# Altium PCB Radio_WMCU.pcbdoc
Units mm, origin at the board's own origin, x right, y up, seen from the top; angles counter-clockwise.
Board outline 76 x 43 mm, 2 copper layers (Top Layer, Bottom Layer), stack 0.325 mm thick; 62 components, 43 nets, 245 pads, 111 vias.
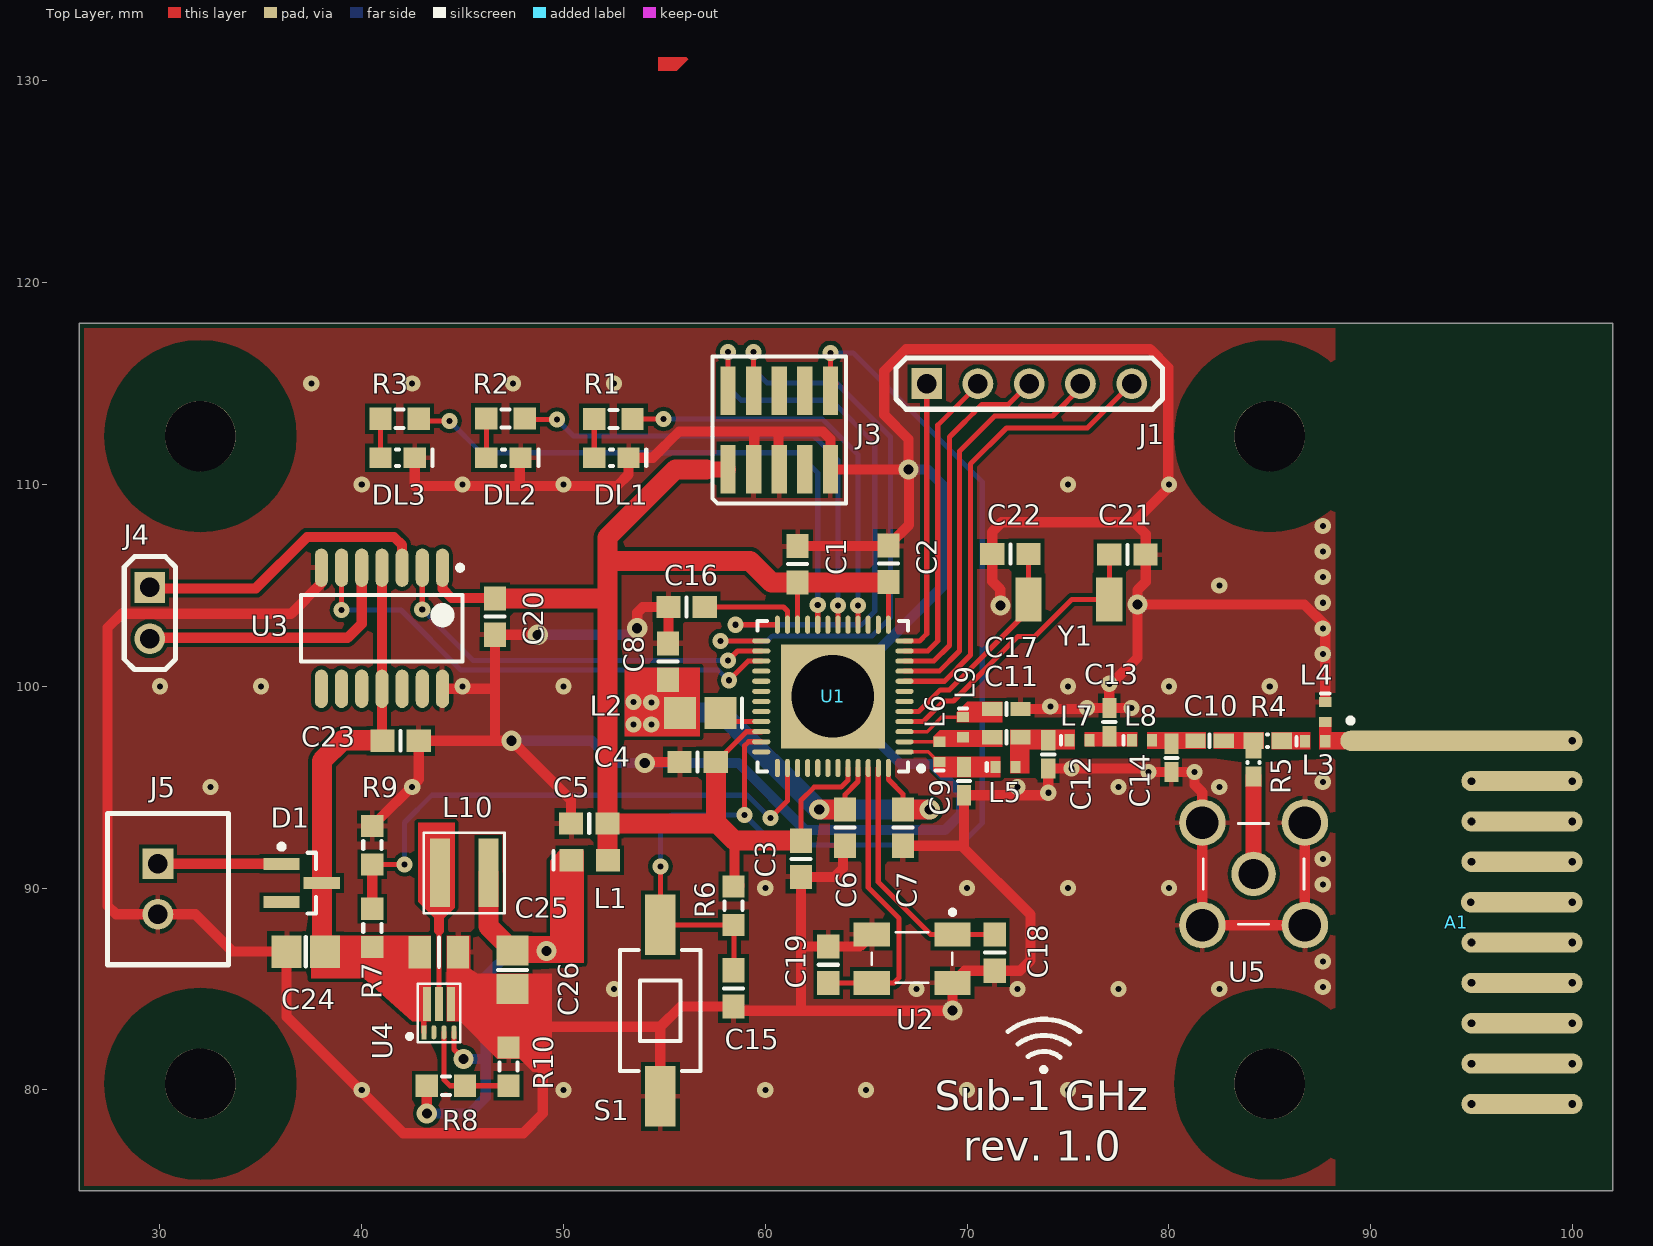
[diagram p0: Top Layer view]
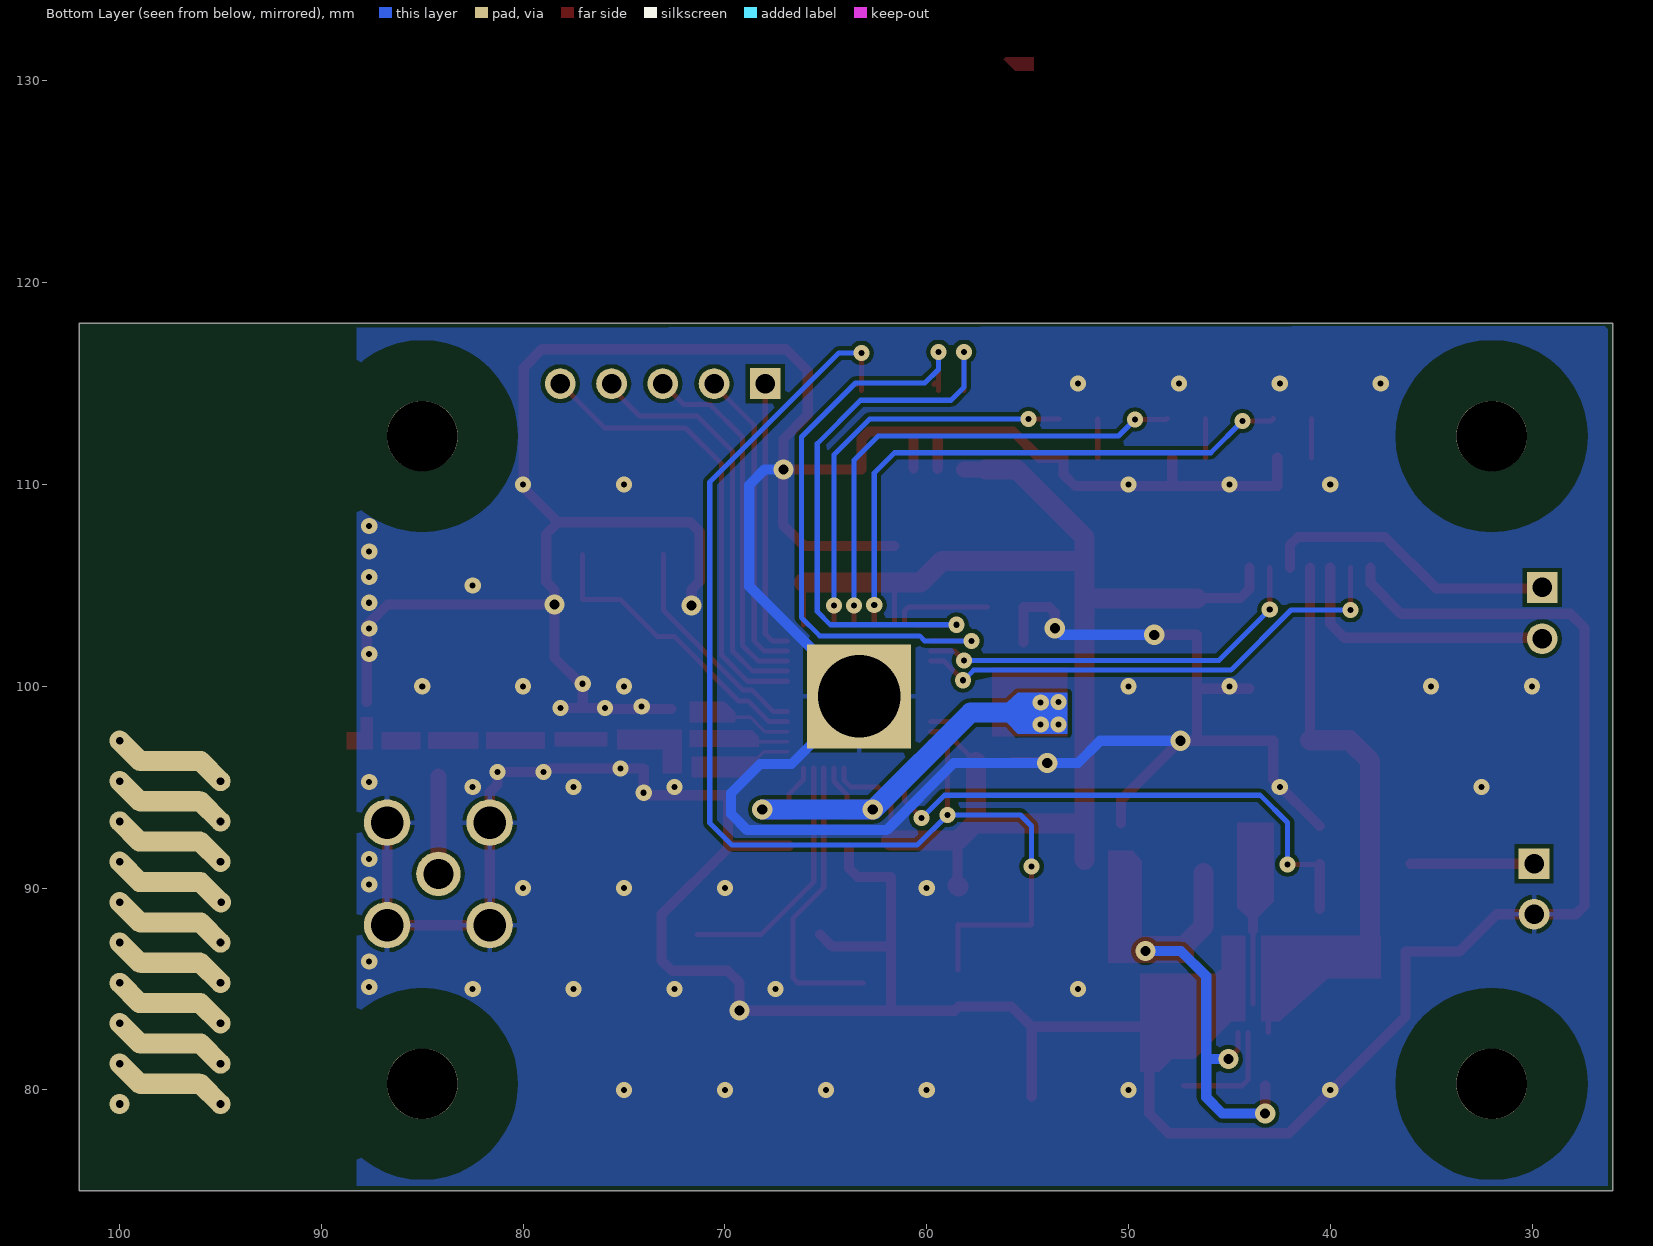
[diagram p1: Bottom Layer view, seen from below]
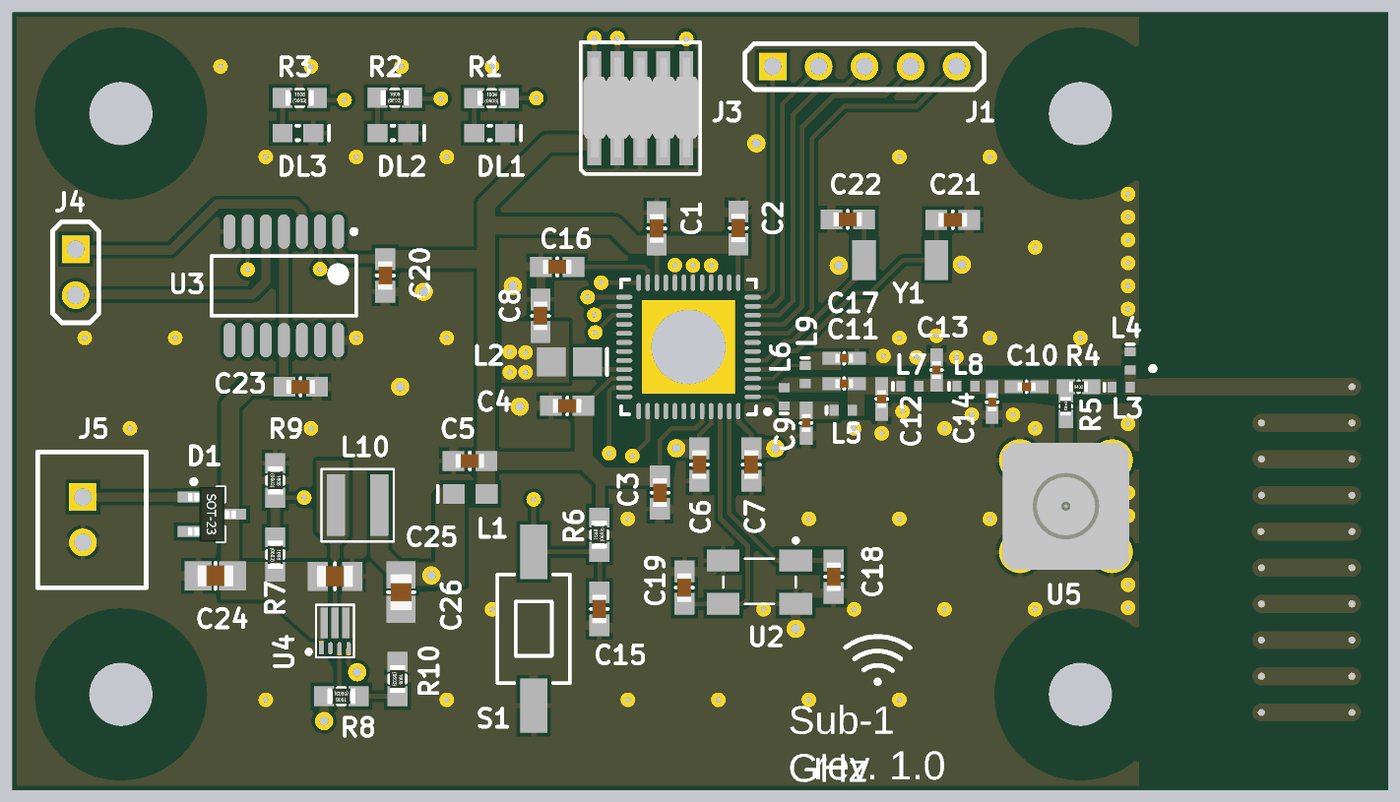
[diagram p2: 3D render of the assembled board from above, using the file's embedded part models]

## Layer stack, top to bottom
Top Solder: solder mask 0.0102, Solder Resist, Dk 3.5
Top Layer: signal copper 0.0356
Dielectric 1: core 0.254, FR-4, Dk 4.2
Bottom Layer: signal copper 0.0356
Bottom Solder: solder mask 0.0102, Solder Resist, Dk 3.5

## Board outline
26,75 26,118 102,118 102,75

## Design rules (kind name [scope] priority, off if disabled: settings)
AssemblyTestPointUsage [All] p1 off:
AssemblyTestpoint [All] p1 off: testpointundercomponent=TRUE minsize=1.016 maxsize=2.54 preferedsize=1.524 minholesize=0 maxholesize=1.016 preferedholesize=0.813 testpointgrid=0.025 usegrid=TRUE gridtolerance=0 allowsidetop=TRUE allowsidebottom=TRUE
Clearance UnplatedPads_Clearance [IsPad and OnLayer('Multi-Layer') and not PadIsPlated] p1: gap=3
Clearance Poly_Clearance [InPolygon] p2: gap=0.2
Clearance Class4_ExtLayers_Clearance [All] p3: gap=0.15
Clearance Class4_IntLayers_Clearance [OnCopper and not (OnLayer('Top Layer') or OnLayer('Bottom Layer'))] p4: gap=0.15
DiffPairsRouting [All] p1: maxlimit=0.15 minlimit=0.15 mostfreqgap=0.15 toplayer_minwidth=0.25 toplayer_maxwidth=0.25 toplayer_prefwidth=0.25 bottomlayer_minwidth=0.25 bottomlayer_maxwidth=0.25 bottomlayer_prefwidth=0.25 maxuncoupledlength=10
FabricationTestPointUsage [All] p1 off: valid=0 allowmultiple=FALSE
FabricationTestpoint [All] p1 off: side=3 testpointundercomponent=TRUE minsize=1.016 maxsize=2.54 preferedsize=1.524 minholesize=0 maxholesize=1.016 preferedholesize=0.813 testpointgrid=0.025 allowsidetop=TRUE allowsidebottom=TRUE usegrid=TRUE gridtolerance=0
HoleSize HoleSize_UnplatedPads [IsPad and not PadIsPlated] p1: absolutevalues=TRUE maxlimit=999 minlimit=0.5 maxpercent=80.000 minpercent=20.000
HoleSize HoleSize_PlatedPads [IsPad and PadIsPlated] p2: absolutevalues=TRUE maxlimit=999 minlimit=0.3 maxpercent=80.000 minpercent=20.000
MinimumAnnularRing MinimumAnnularRing_Pad [IsPad and PadIsPlated] p1: minimumring=0.25
MinimumAnnularRing MinimumAnnularRing_Via [IsVia] p2: minimumring=0.15
MinimumSolderMaskSliver [All] p1: minsoldermaskwidth=0.15
NetAntennae [All] p1 off: netantennaetolerance=0
PlaneClearance [All] p1: clearance=0.3
PlaneConnect [All] p1: planeconnectstyle=Relief reliefexpansion=0.5 reliefentries=4 reliefconductorwidth=0.25 reliefairgap=0.2
PlaneConnect PlaneConnect_Via_Thermal [IsVia or InPadClass('ThermalPads')] p2: planeconnectstyle=Direct reliefexpansion=0.508 reliefentries=4 reliefconductorwidth=0.254 reliefairgap=0.254
PolygonConnect PolygonConnect_Via [IsVia] p1: connectstyle=Direct reliefconductorwidth=0.254 reliefentries=4 polygonreliefangle="90 Angle" airgapwidth=0.254
PolygonConnect [All] p2: connectstyle=Relief reliefconductorwidth=0.25 reliefentries=4 polygonreliefangle="90 Angle" airgapwidth=0.2
RoutingVias RADIO_RoutingVias [HasFootprint('ANTENNA')] p1: holewidth=0.2 width=1.2 viastyle="Through Hole" minholewidth=0 minwidth=0.5 maxholewidth=1 maxwidth=2
RoutingVias Thermal_RoutingVias [IsVia and InAnyComponent] p2: holewidth=0.2 width=0.5 viastyle="Through Hole" minholewidth=0.2 minwidth=0.5 maxholewidth=0.2 maxwidth=0.5
RoutingVias PWR_RoutingVias [InNetClass('PWR')] p3: holewidth=0.5 width=1 viastyle="Through Hole" minholewidth=0.3 minwidth=0.8 maxholewidth=0.5 maxwidth=1
RoutingVias [All] p4: holewidth=0.3 width=0.8 viastyle="Through Hole" minholewidth=0.3 minwidth=0.8 maxholewidth=0.3 maxwidth=0.8
ShortCircuit ShortCircuit_RADIO [HasFootprint('ANTENNA')] p1: allowed=TRUE
ShortCircuit [All] p2: allowed=FALSE
SilkToBoardRegionClearance [All] p1 off:
SilkToSilkClearance [All] p1: silktosilkclearance=0.15
SilkToSolderMaskClearance [IsPad vs IsText] p1: minsilkscreentomaskgap=0.05 clearancetoexposedcopper=TRUE
SolderMaskExpansion SolderMaskExpansion_Vias [IsVia] p1: expansion=-10
SolderMaskExpansion SolderMaskExpansion_Pads [IsPad] p2: expansion=0.05
Width PWR_Width [InNetClass('PWR')] p1: maxlimit=10 minlimit=0.25 preferedwidth=0.508
Width Class4_Width_ExtLayers [OnTopLayer or onBottomlayer] p2: maxlimit=10 minlimit=0.15 preferedwidth=0.15
Width Class4_Width_IntLayers [OnCopper and not (OnTopLayer or onBottomLayer)] p3: maxlimit=10 minlimit=0.15 preferedwidth=0.15
15 further rules are at their usual default settings.

## Classes and differential pairs
net class PWR: 3V3 GND NetD1_1 NetL10_1 NetR8_1 VBATT VDDR

## Components (designator, comment, footprint, x,y, rotation, side; value= is the part's Value field where it differs from the comment)
A1 "ANTENNA_HELICAL" ANTENNA 89,97.3 r0 top
C1 "CAPC_0603" CAPC1608-0603M 61.6,106.05 r270 top
C2 "CAPC_0603" CAPC1608-0603M 66.1,106.075 r270 top
C3 "CAPC_0603" CAPC1608-0603M 61.775,91.45 r90 top
C4 "CAPC_0603" CAPC1608-0603M 56.65,96.25 r0 top
C5 "CAPC_0603" CAPC1608-0603M 51.275,93.2 r0 top
C6 "CAPC_0603" CAPC1608-0603M 63.95,93 r90 top
C7 "CAPC_0603" CAPC1608-0603M 66.825,93 r90 top
C8 "CAPC_0603" CAPC1608-0603M 55.175,101.225 r270 top
C9 "CAPC_0402" CAPC1005-0402M 69.85,95.3 r270 top
C10 "CAPC_0402" CAPC1005-0402M 82.025,97.3 r0 top
C11 "CAPC_0402" CAPC1005-0402M 71.95,97.475 r0 top
C12 "CAPC_0402" CAPC1005-0402M 74.025,96.625 r90 top
C13 "CAPC_0402" CAPC1005-0402M 77.05,98.225 r270 top
C14 "CAPC_0402" CAPC1005-0402M 80.125,96.45 r90 top
C15 "CAPC_0603" CAPC1608-0603M 58.425,85.025 r90 top
C16 "CAPC_0603" CAPC1608-0603M 56.1,103.925 r0 top
C17 "CAPC_0402" CAPC1005-0402M 71.95,98.875 r180 top
C18 "CAPC_0603" CAPC1608-0603M 71.375,86.8 r90 top
C19 "CAPC_0603" CAPC1608-0603M 63.125,86.2 r270 top
C20 "CAPC_0603" CAPC1608-0603M 46.6,103.45 r90 top
C21 "CAPC_0603" CAPC1608-0603M 77.95,106.525 r180 top
C22 "CAPC_0603" CAPC1608-0603M 72.15,106.55 r0 top
C23 "CAPC_0603" CAPC1608-0603M 41.925,97.3 r180 top
C24 "CAPC_0805" CAPC2012-0805M#1 37.225,86.85 r0 top
C25 "CAPC_0805" CAPC2012-0805M#2 43.825,86.825 r180 top
C26 "CAPC_0805" CAPC2012-0805M#1 47.475,85.95 r90 top
D1 "BAT721" SOT23-3M 37.025,90.25 r0 top
DL1 "LED_0603" DIODEC1608-0603 52.375,111.325 r0 top
DL2 "LED_0603" DIODEC1608-0603 47.025,111.325 r0 top
DL3 "LED_0603" DIODEC1608-0603 41.775,111.325 r0 top
J1 "Conn-5" CONN-5-2.54 68,115 r90 top
J3 "PLD-10-1.27-SMT" PLD-10-1.27-SMT 58.15,110.75 r90 top
J4 "PLS-2-2.54" PLS-2-2.54 29.5,104.9 r0 top
J5 "CWF-2" CWF-2 29.9,91.2 r0 top
L1 "INDC-0603" INDC1608M 51.3,91.375 r0 top
L2 "INDC-0805" INDC2012M 56.775,98.675 r180 top
L3 "INDC-0402" INDC1005-0402-RF2.4GHz 87.25,97.275 r0 top
L4 "INDC-0402" INDC1005-0402-RF2.4GHz 87.75,98.725 r270 top
L5 "INDC-0402" INDC1005-0402-RF2.4GHz 71.9,96 r0 top
L6 "INDC-0402" INDC1005-0402-RF2.4GHz 68.625,96.75 r90 top
L7 "INDC-0402" INDC1005-0402-RF2.4GHz 75.575,97.325 r0 top
L8 "INDC-0402" INDC1005-0402-RF2.4GHz 78.675,97.325 r0 top
L9 "INDC-0402" INDC1005-0402-RF2.4GHz 69.8,97.975 r270 top
L10 "XFL4015" XFL4015 43.875,90.75 r0 top
R1 "RESC_0603" RESC1608-0603M 52.475,113.25 r0 top
R2 "RESC_0603" RESC1608-0603M 47.125,113.275 r0 top
R3 "RESC_0603" RESC1608-0603M 41.876,113.262 r0 top
R4 "RESC_0402" RESC1005-0402M 84.9,97.3 r0 top
R5 "RESC_0402" RESC1005-0402M 84.2,96.225 r270 top
R6 "RESC_0603" RESC1608-0603M 58.425,89.125 r90 top
R7 "RESC_0603" RESC1608-0603M 40.525,88.025 r270 top
R8 "RESC_0603" RESC1608-0603M 44.175,80.2 r180 top
R9 "RESC_0603" RESC1608-0603M 40.525,92.125 r270 top
R10 "RESC_0603" RESC1608-0603M 47.275,81.15 r270 top
S1 "SMD_SW" SMD_SW_1 54.8,83.925 r90 top
U1 "CC1310F128RGZR" QFN-48M 63.35,99.5 r180 top
U2 "ABM3B-24MHz" ABM3B-24MHz 69.275,85.3 r180 top
U3 "LB1838M" MFP14S_M 41,102.875 r270 top
U4 "TPS62085RLT" RLT7-0506 43.075,82.85 r90 top
U5 "SMA_CONN" SMA_CONN 84.2,90.7 r0 top
Y1 "KX-327XS" KX-327xs 77.05,104.3 r180 top

## Footprints (in the part's own frame and the unit in brackets; to place one, negate y for a bottom-side part, rotate by r counter-clockwise, add the part's x,y. Pads: shape width x height; smd on the part's side, far side on the other; paste and mask are expansions set on the pad)
ABM3B-24MHz [mm] "SMD Crystal, 24MHz"
  rect 1.8x1.2 smd: 1(0,-2.4) 2(4,-2.4) 3(4,0) 4(0,0)
  silkscreen extent -0.1,-3.6 4,0, body extent -0.5,-2.95 4.5,0.55, height 0.7
ANTENNA [mm] "ANTENNA_HELICAL"
  round 1 smd paste-1 mask-1: 1(0,0)
  oval 12x1 smd paste-12 mask-12: ""(5.5,0)
  oval 1x2.414 smd far side rot 135 paste-1.5 mask-1.5: ""(6.5,-17.5) ""(6.5,-15.5) ""(6.5,-13.5) ""(6.5,-11.5) ""(6.5,-9.5) ""(6.5,-7.5) ""(6.5,-5.5) ""(6.5,-3.5) ""(6.5,-1.5) ""(10.5,-16.5) ""(10.5,-14.5) ""(10.5,-12.5) ""(10.5,-10.5) ""(10.5,-8.5) ""(10.5,-6.5) ""(10.5,-4.5) ""(10.5,-2.5) ""(10.5,-0.5)
  oval 6x1 smd paste-6 mask-6: ""(8.5,-18) ""(8.5,-16) ""(8.5,-14) ""(8.5,-12) ""(8.5,-10) ""(8.5,-8) ""(8.5,-6) ""(8.5,-4) ""(8.5,-2)
  oval 4x1 smd far side paste-4 mask-4: ""(8.5,-17) ""(8.5,-15) ""(8.5,-13) ""(8.5,-11) ""(8.5,-9) ""(8.5,-7) ""(8.5,-5) ""(8.5,-3) ""(8.5,-1)
  silkscreen extent -0.12,0.88 0.13,1.12
CAPC1005-0402M [mm] "Chip Capacitor, Body 1.0x0.5mm, IPC Low Density"
  rect 1x0.7 smd: 1(-0.7,0) 2(0.7,0)
  silkscreen extent 0,-0.3 0,0.3, body extent -0.5,-0.25 0.5,0.25, height 0.5
CAPC1608-0603M [mm] "Chip Capacitor, Body 1.6x0.8mm, IPC Low Density"
  rect 1.2x1.1 smd: 1(-0.9,0) 2(0.9,0)
  silkscreen extent 0,-0.48 0,0.48, body extent -0.8,-0.4 0.8,0.4, height 0.6
CAPC2012-0805M#1 [mm] "Chip Capacitor, Body 2.0x1.3mm, IPC Low Density"
  rect 1.5x1.6 smd: 1(-0.95,0) 2(0.95,0)
  silkscreen extent 0,-0.72 0,0.72, body extent -1,-0.6 1,0.6, height 0.95
CAPC2012-0805M#2 [mm] "Chip Capacitor, Body 2.0x1.3mm, IPC Low Density"
  rect 1.1x1.6 smd: 1(-0.95,0) 2(0.95,0)
  silkscreen extent 0,-0.72 0,0.72, body extent -1,-0.6 1,0.6, height 0.95
CONN-5-2.54 [mil] "Classic 100 mil header plastic case"
  rect 60x60 hole 38: 1(0,0)
  round 60 hole 38: 2(0,-100) 3(0,-200) 4(0,-300) 5(0,-400)
  silkscreen extent -50,-460 50,60, body extent -50,-460 50,60, height 300
CWF-2 [mil] "2.5 2 pin CWF-2 connector"
  rect 60x60 hole 38: 1(0,0)
  round 60 hole 38: 2(0,-98.43)
  silkscreen extent -98,-197 138,98, body extent -98,-197 138,98, height 300
DIODEC1608-0603 [mm] "Chip Diode; Body 1.6 x 0.8 mm (LxW typ)"
  rect 1.1x1 smd: 1(-0.85,0) 2(0.85,0)
  silkscreen extent -0.08,-0.4 1.73,0.4
INDC1005-0402-RF2.4GHz [mm] "Chip Inductor, Body 1.0x0.5mm, RF 2.4GHz recommended design"
  rect 0.5x0.6 smd: 1(-0.5,0) 2(0.5,0)
  silkscreen extent -0.92,-0.2 -0.92,0.2, body extent -0.5,-0.25 0.5,0.25, height 0.55
INDC1608M [mm] "Chip Inductor, Body 1.6x0.8mm, IPC Low Density"
  rect 1.2x1.1 smd: 1(-0.9,0) 2(0.9,0)
  silkscreen extent -1.8,-0.45 -1.8,0.45, body extent -0.87,-0.48 0.87,0.48, height 0.71
INDC2012M [mm] "Chip Inductor, Body 2.0x1.2mm, IPC Low Density"
  rect 1.6x1.6 smd: 1(-1,0) 2(1,0)
  silkscreen extent -2.08,-0.72 -2.08,0.72, body extent -1.1,-0.7 1.1,0.7, height 1.1
KX-327xs [mm] "KX-327XS quartz rezonator"
  rect 1.3x2.2 smd: 1(0,0) 2(4,0)
  body extent -0.47,-0.91 4.48,0.91, height 0.96
MFP14S_M [mm] "SOP, 14-Leads, Body 8.00x4.40mm, Pitch 1.00mm, IPC Low Density"
  oval 1.9x0.65 smd: 1(-3,3) 2(-3,2) 3(-3,1) 4(-3,0) 5(-3,-1) 6(-3,-2) 7(-3,-3) 8(3,-3) 9(3,-2) 10(3,-1) 11(3,0) 12(3,1) 13(3,2) 14(3,3)
  silkscreen extent -3.12,-4 1.65,4, body extent -2.2,-4 2.2,4, height 1.7
PLD-10-1.27-SMT [mm] "PLD-10-1.27-SMT header"
  rect 2.4x0.76 smd: 1(0,0) 2(3.9,0) 3(0,-1.27) 4(3.9,-1.27) 5(0,-2.54) 6(3.9,-2.54) 7(0,-3.81) 8(3.9,-3.81) 9(0,-5.08) 10(3.9,-5.08)
  silkscreen extent -1.69,-5.84 5.59,0.76, body extent -0.77,-5.74 4.73,0.61, height 4.5
PLS-2-2.54 [mil] "Classic 100 mil header plastic case"
  rect 60x60 hole 38: 1(0,0)
  round 60 hole 38: 2(0,-100)
  silkscreen extent -50,-160 50,60, body extent -50,-160 50,60, height 300
QFN-48M [mm] "QFN, 48-Leads, Body 7.00x7.00mm, Pitch 0.50mm, Thermal Pad 5.15x5.15mm, IPC Low Density"
  oval 0.9x0.25 smd: 1(-3.55,2.75) 2(-3.55,2.25) 3(-3.55,1.75) 4(-3.55,1.25) 5(-3.55,0.75) 6(-3.55,0.25) 7(-3.55,-0.25) 8(-3.55,-0.75) 9(-3.55,-1.25) 10(-3.55,-1.75) 11(-3.55,-2.25) 12(-3.55,-2.75) 25(3.55,-2.75) 26(3.55,-2.25) 27(3.55,-1.75) 28(3.55,-1.25) 29(3.55,-0.75) 30(3.55,-0.25) 31(3.55,0.25) 32(3.55,0.75) 33(3.55,1.25) 34(3.55,1.75) 35(3.55,2.25) 36(3.55,2.75)
  oval 0.25x0.9 smd: 13(-2.75,-3.55) 14(-2.25,-3.55) 15(-1.75,-3.55) 16(-1.25,-3.55) 17(-0.75,-3.55) 18(-0.25,-3.55) 19(0.25,-3.55) 20(0.75,-3.55) 21(1.25,-3.55) 22(1.75,-3.55) 23(2.25,-3.55) 24(2.75,-3.55) 37(2.75,3.55) 38(2.25,3.55) 39(1.75,3.55) 40(1.25,3.55) 41(0.75,3.55) 42(0.25,3.55) 43(-0.25,3.55) 44(-0.75,3.55) 45(-1.25,3.55) 46(-1.75,3.55) 47(-2.25,3.55) 48(-2.75,3.55)
  rect 5.15x5.15 hole 4.1: 49(0,0)
  silkscreen extent -4.5,-3.72 3.72,3.73, body extent -3.58,-3.57 3.57,3.58, height 1
RESC1005-0402M [mm] "Chip Resistor, Body 1.1x0.5mm, IPC Low Density"
  rect 1x0.8 smd: 1(-0.7,0) 2(0.7,0)
  silkscreen extent -0.03,-0.3 0.03,0.3, body extent -0.52,-0.3 0.52,0.3, height 0.34
RESC1608-0603M [mm] "Chip Resistor, Body 1.6x0.8mm, IPC Low Density"
  rect 1.1x1.1 smd: 1(-0.95,0) 2(0.95,0)
  silkscreen extent -0.2,-0.45 0.2,0.45, body extent -0.77,-0.42 0.78,0.43, height 0.45
RLT7-0506 [mm] "DC-DC, step-down"
  rect 0.7x0.25 smd mask+0.05: 1(0,0)
  oval 0.7x0.25 smd mask+0.05: 2(0,-0.5) 3(0,-1) 4(0,-1.5)
  rect 1.7x0.4 smd mask-0.05: 5(1.4,-1.35) 6(1.4,-0.75) 7(1.4,-0.15)
  silkscreen extent -0.5,-1.8 2.4,0.8, body extent -0.2,-1.7 2.1,0.2, height 0.7
SMA_CONN [mm] "SMA PCB Connector"
  round 2.2 hole 1.5: 1(0,0)
  round 2.3 hole 1.6: 2(2.54,-2.54) 3(2.54,2.54) 4(-2.54,2.54) 5(-2.54,-2.54)
  silkscreen extent -2.5,-2.5 2.5,2.5, body extent -3.5,-3.5 3.5,3.5, height 10
SMD_SW_1 [mm]
  rect 3x1.5 smd: 1(-4.25,0) 2(4.25,0)
  silkscreen extent -3,-2 3,2, body extent -3,-2 3,2, height 4.1
SOT23-3M [mm] "SOT23, 3-Leads, Body 2.9x1.3mm, Pitch 0.95mm, Lead Span 2.5mm, IPC Low Density"
  rect 1.8x0.6 smd: 1(-1,0.95) 2(-1,-0.95) 3(1,0)
  silkscreen extent -1.12,-1.5 0.7,1.92, body extent -1.32,-1.5 1.32,1.5, height 1.08
XFL4015 [mm] "XFL4015 Series Power Inductors"
  rect 1x3.4 smd: 1(0,0) 2(2.4,0)
  silkscreen extent -0.8,-2 3.2,2, body extent -0.8,-2 3.2,2, height 0.7

## Part data
A1: "PCB helical antenna"
C1 C2 C3 C4 C5 C6 C7 C8 C15 C16 C18 C19 C20 C21 C22 C23: "Capacitor 0603"
C9 C10 C11 C12 C13 C14 C17: "Capacitor 0402"
C24 C25 C26: "Capacitor 0805"
D1: "BAT721 Schottky diode(s)"
DL1 DL2 DL3: "LED 0603"
J1: "Header, 6-Pin, Dual row"
L1: "Chip Inductor, Body Body 1.6x0.8mm"
L2: "Chip Inductor, Body Body 2.0x1.2mm"
L3 L4 L5 L6 L7 L8 L9: "Chip Inductor, Body 1.0x0.5mm"
L10: "Power Inductors"
R1 R2 R3 R6 R7 R8 R9 R10: "Resistor 0603"
R4 R5: "Resistor 0402"
S1: "Switch"
U1: "Ultralow Power Sub-1-GHz Wireless MCU"
U2: "Crystal Oscillator, 24 MHz, SMD, 5mm x 3.2mm"
U3: "Low-Voltage, Bidiractional Motor Driver"
U4: "Step-Down Converter With Hiccup Short-Circuit Protection, 2.5-V to 6.0-V input Voltage Range"
U5: "SMA Straight PCB Socket"
Y1: "Surface Mount Quartz Crystal"

## Free pads (board coordinates)
  round 3.5 hole 3.5 unplated: 0(32,80.3) 0(32,112.4) 0(85,80.3) 0(85,112.4)

## Via types
v1: diameter 0.8, hole 0.3, Top Layer to Bottom Layer, 79 vias
v2: diameter 1, hole 0.38, Top Layer to Bottom Layer, 19 vias
v3: diameter 1, hole 0.5, Top Layer to Bottom Layer, 13 vias

## Nets (pads, with @x,y where several pads share a name; then routed paths per layer and width w, separated by ;. In a path a pad name is that pad's centre, name@x,y a point inside that pad or via, vN(x,y) a via of type N, cw(c..) or ccw(c..) an arc to the next point about the centre after c; other vN are vias at no path point)
3V3: C26.2 L1.1 L10.2 R8.2 U4.4 | length 22.7
  Top Layer w0.254: U4.4 44.575,82 v3(45.05,81.525)
  Top Layer w0.508: v3(43.225,78.825) R8.2 ; C26.2@47.5,86.875 v3(49.15,86.875)
  Top Layer w1: L10.2 46.275,88.1 C26.2
  Bottom Layer w0.508: v3(43.225,78.825) 45.35,78.825 46.15,79.625 46.15,85.625 47.4,86.875 v3(49.15,86.875) ; v3(45.05,81.525) 46.125,81.525
DCDC_SW: L2.1 U1.33 | length 1.9
  Top Layer w0.254: L2.1@57.875,98.25 U1.33
ENA1: U1.26 U3.2 | length 20.1
  Top Layer w0.254: v1(43,103.8) U3.2 ; v1(58.15,101.275) 58.625,101.75 U1.26
  Bottom Layer w0.254: v1(43,103.8) 45.525,101.275 v1(58.15,101.275)
GND: C1.1 C2.1 C3.1 C4.1 C5.1 C6.1 C7.1 C8.1 C9.2 C12.1 C13.1 C14.1 C15.1 C16.1 C17.1 C18.1 C19.1 C20.1 C21.1 C22.1 C23.1 C24.1 C25.1 C26.1 DL1.2 DL2.2 DL3.2 J3.3 J3.5 J3.9 J5.2 L4.1 R9.1 R10.1 S1.1 U1.49 U2.2 U2.4 U3.7 U3.14 U4.5 U5.2 U5.3 U5.4 U5.5 | length 340.5
  Top Layer w0.508: U3.7 38,105.1 36.5,103.6 28.1,103.6 27.4,102.9 27.4,89.125 27.825,88.7 J5.2 31.75,88.7 33.6,86.85 C24.1 36.275,83.625 42.05,77.85 48,77.85 48.975,78.825 48.975,81.475 ; R9.1 42.825,95.375 C23.1 v3(47.425,97.3) 50.375,94.35 C5.1 ; DL3.2 42.625,109.925 47.825,109.925 ; U3.14 46.475,99.875 ; 46.6,97.375 C20.1 v3(48.725,102.55) ; DL2.2@47.825,111.275 47.825,109.925 ; 48.375,83.175 48.425,83.125 54.8,83.125 ; v3(53.65,102.875) 53.65,103.65 53.925,103.925 C16.1 C8.1@55.2,102.175 ; v3@54.075,96.25 C4.1 ; S1.1 54.8,83.125 ; J3.3@59.45,110.78 59.45,112.625 ; J3.5@60.65,110.79 60.65,112.625 ; C1.1 66.075,106.95 C2.1 67.125,108 v3@67.125,110.725 ; 61.775,83.95 C3.1 63.425,90.55 63.85,90.975 C6.1@63.85,92 ; 61.8,87.1 C19.1 64.675,87.1 U2.2 ; C7.1 69.725,92.1 ; v3(71.65,104) 71.65,104.8 71.25,105.2 C22.1 71.25,107.65 71.725,108.125 78.275,108.125 ; C17.1 v1@73.9,98.875 ; v1(74.125,99) 74.25,98.875 75.9,98.875 v1(75.95,98.925) C13.1 ; v1(78.15,98.925) C13.1 ; U5.3 U5.2 U5.5 U5.4 81.66,94.74 81.275,95.125 v1(81.275,95.75) C14.1 v1(79,95.75) 78.825,95.925 v1(75.175,95.925) C12.1 v1(74.025,94.725) 73.9,94.6 C9.2 69.85,91.975 73.15,88.675 73.15,86.425 72.625,85.9 C18.1 69.875,85.9 U2.4 v3(69.275,83.925) 58.625,83.925 C15.1 55.8,84.125 54.8,83.125 ; L4.1 87.75,103.025 86.725,104.05 v3(78.45,104.05) ; 47.825,109.925 52.65,109.925 53.225,110.5 DL1.2 54.425,111.325 55.725,112.625 59.45,112.625 ; 59.45,112.625 60.65,112.625 ; 60.65,112.625 62.85,112.625 63.23,112.245 J3.9 v3(67.1,110.75) 67.1,112.25 65.9,113.45 65.9,115.625 66.975,116.7 79.071,116.7 79.975,115.796 79.975,109.825 78.275,108.125 ; C13.1 v1(77.05,100.125) 77.15,100.125 78.45,101.425 v3(78.45,104.05) ; 78.275,108.125 78.85,107.55 C21.1 78.85,105.175 78.45,104.775 v3(78.45,104.05)
  Bottom Layer w0.508: v3(47.425,97.3) 51.4,97.3 52.5,96.2 v3(54.025,96.2) 58.662,96.2 61.987,92.875 68.9,92.875 69.7,93.675 69.7,94.7 68.25,96.15 66.7,96.15 U1.49 68.8,104.95 68.8,109.975 68.025,110.75 v3(67.1,110.75) ; v3(48.725,102.55) 53.325,102.55 v3(53.65,102.875)
  other v1: 40,80 50,80 60,80 65,80 70,80 75,80 52.5,85 67.5,85 72.5,85 77.5,85 82.5,85 87.63,85.09 87.63,86.36 60,90 70,90 75,90 80,90 87.63,90.17 87.63,91.44 32.5,95 42.5,95 72.5,95 77.5,95 82.5,95 87.63,95.25 30,100 35,100 45,100 50,100 75,100 80,100 85,100 87.63,101.6 87.63,102.87 87.63,104.14 82.5,105 87.63,105.41 87.63,106.68 87.63,107.95 40,110 45,110 50,110 75,110 80,110 37.5,115 42.5,115 47.5,115 52.5,115
IN1: U1.27 U3.6 | length 25
  Top Layer w0.254: v1(39,103.775) U3.6 ; v1@58.2,100.05 v1(58.2,100.3) 59.15,101.25 U1.27
  Bottom Layer w0.254: v1(39,103.775) 41.95,103.775 44.925,100.8 57.668,100.8 58.168,100.3 v1(58.2,100.3)
JTAG_TCK: J3.4 U1.25 | length 30.9
  Top Layer w0.254: v1(57.775,102.25) U1.25 ; J3.4 v1(59.42,116.575) ; J3.4@59.575,115.02 J3.4@59.645,114.95
  Bottom Layer w0.254: v1(57.775,102.25) 60.1,102.25 60.35,102.5 65.3,102.5 66.2,103.4 66.2,112.35 63.525,115.025 60.1,115.025 59.42,115.705 v1(59.42,116.575)
JTAG_TMS: J3.2 U1.24 | length 29.7
  Top Layer w0.254: J3.2 v1(58.15,116.575) ; v1(58.525,103.05) U1.24
  Bottom Layer w0.254: v1(58.15,116.575) 58.15,114.825 58.8,114.175 63.275,114.175 65.425,112.025 65.425,103.7 64.775,103.05 v1(58.525,103.05)
LED1: R1.2 U1.16 | length 20.3
  Top Layer w0.254: R1.2 v1(54.95,113.25) ; U1.16 v1(64.6,104)
  Bottom Layer w0.254: v1(54.95,113.25) 62.825,113.25 64.6,111.475 v1(64.6,104)
LED2: R2.2 U1.18 | length 24.5
  Top Layer w0.254: R2.2 48.125,113.225 v1(49.675,113.225) ; U1.18 v1(63.6,104)
  Bottom Layer w0.254: v1(49.675,113.225) 50.5,112.4 62.4,112.4 63.6,111.2 v1(63.6,104)
LED3: R3.2 U1.20 | length 28.4
  Top Layer w0.254: R3.2 42.938,113.15 v1(44.35,113.15) ; U1.20 v1(62.6,104.025)
  Bottom Layer w0.254: v1(44.35,113.15) 45.925,111.575 61.6,111.575 62.6,110.575 v1(62.6,104.025)
NetA1_1: A1.1 L3.2 L4.2
NetC9_1: C9.1 L5.1 L6.1 U1.1 | length 1.9
  Top Layer w0.178: U1.1 68.075,96.75 L6.1@68.6,96.225
NetC10_1: C10.1 C14.2 L8.2
NetC10_2: C10.2 R4.1 R5.1
NetC11_1: C11.1 L6.2 L9.2 U1.2 | length 1.7
  Top Layer w0.178: U1.2 L6.2
NetC11_2: C11.2 C12.2 L5.2 L7.1
NetC13_2: C13.2 L7.2 L8.1
NetC16_2: C16.2 U1.23 | length 4.9
  Top Layer w0.254: C16.2 60.9,103.925 61.1,103.725 U1.23
NetC17_2: C17.2 L9.1 U1.3 | length 3.2
  Top Layer w0.178: U1.3 68.025,97.75 68.75,98.475 L9.1
NetC18_2: C18.2 U1.47 U2.1 | length 12.5
  Top Layer w0.254: U1.47 65.6,90.3 68.2,87.7 U2.1 C18.2
NetC19_2: C19.2 U1.46 U2.3 | length 14.6
  Top Layer w0.254: C19.2 U2.3 66.375,85.3 66.625,85.55 66.625,88.5 65.1,90.025 U1.46
NetC21_2: C21.2 U1.4 Y1.1 | length 14.9
  Top Layer w0.254: U1.4 67.825,98.25 68.85,99.275 69.325,99.275 72.525,102.475 73.367,102.475 75.192,104.3 Y1.1 C21.2
NetC22_2: C22.2 U1.5 Y1.2 | length 11
  Top Layer w0.254: U1.5 67.6,98.75 68.675,99.825 69.125,99.825 73.05,103.75 Y1.2 C22.2
NetD1_1: D1.1 J5.1 | length 6.1
  Top Layer w0.508: J5.1 D1.1
NetDL1_1: DL1.1 R1.1 | length 1.9
  Top Layer w0.254: DL1.1 R1.1
NetDL2_1: DL2.1 R2.1 | length 2
  Top Layer w0.254: DL2.1 R2.1
NetDL3_1: DL3.1 R3.1 | length 1.9
  Top Layer w0.254: DL3.1@40.926,111.326 R3.1
NetJ1_1: J1.1 U1.12 | length 13.6
  Top Layer w0.254: U1.12 67.65,102.25 68,102.6 J1.1
NetJ1_2: J1.2 U1.11 | length 15.5
  Top Layer w0.254: U1.11 68.05,101.75 68.55,102.25 68.55,112.94 70.575,114.965 J1.2
NetJ1_3: J1.3 U1.10 | length 17.9
  Top Layer w0.254: U1.10 68.35,101.25 69.125,102.025 69.125,112.35 69.528,112.753 70.333,113.558 70.736,113.961 72.041,113.961 J1.3
NetJ1_4: J1.4 U1.9 | length 20.6
  Top Layer w0.254: U1.9 68.625,100.75 69.625,101.75 69.625,111.65 71.375,113.4 74.23,113.4 75.725,114.895 J1.4
NetJ1_5: J1.5 U1.8 | length 22.3
  Top Layer w0.254: U1.8 68.875,100.25 70.175,101.55 70.175,111.025 71.95,112.8 75.96,112.8 J1.5@77.73,114.57
NetJ4_1: J4.1 U3.3 | length 14.9
  Top Layer w0.508: J4.1 29.55,104.85 34.75,104.85 37.3,107.4 41.6,107.4 42,107 U3.3
NetJ4_2: J4.2 U3.5 | length 13.5
  Top Layer w0.508: J4.2@29.54,102.4 39.3,102.4 40,103.1 U3.5
NetL3_1: L3.1 R4.2
NetL10_1: L10.1 U4.6 | length 4.2
  Top Layer w0.254: U4.6 43.825,87.9
  Top Layer w0.508: 43.825,87.9 43.825,88.5
NetR5_2: R5.2 U5.1 | length 4.8
  Top Layer w0.8: U5.1 R5.2
NetR7_1: R7.1 R9.2 U1.38 | length 27.9
  Top Layer w0.254: R9.2 v1(42.125,91.175) ; v1(60.25,93.475) 61.1,94.325 U1.38
  Top Layer w0.508: R7.1 R9.2
  Bottom Layer w0.254: v1(42.125,91.175) 42.125,93.25 43.475,94.6 59.125,94.6 v1(60.25,93.475)
NetR8_1: R8.1 R10.2 U4.3 | length 5.7
  Top Layer w0.254: U4.3 44.075,80.5 44.375,80.2 R8.1 R10.2
NRESET: C15.2 J3.10 R6.1 S1.2 U1.35 | length 61.4
  Top Layer w0.254: v1(54.8,91.075) S1.2 R6.1 58.45,88.2 C15.2@58.45,85.95 ; v1(58.975,93.625) 58.975,97.05 59.175,97.25 U1.35 ; J3.10 v1(63.23,116.525) ; J3.10@63.455,114.95 J3.10@63.5,114.995
  Bottom Layer w0.254: v1(54.8,91.075) 54.8,93.075 55.35,93.625 v1(58.975,93.625) 60.475,92.125 69.65,92.125 70.75,93.225 70.75,110.125 64.35,116.525 v1(63.23,116.525)
VBATT: C23.2 C24.2 C25.2 D1.3 R7.2 U3.4 U3.11 U4.1 U4.7 | length 22.9
  Top Layer w0.254: U4.1 43.075,84.1 U4.7
  Top Layer w0.508: C24.2@38.025,87 C24.2 ; C23.2@41,97.325 U3.11 U3.4
  Top Layer w1: C24.2@38.025,87 D1.3 38.025,96.3 39.05,97.325 C23.2@41,97.325
VDDR: C6.2 C7.2 C8.2 L2.2 U1.45 U1.48 | length 23.1
  Top Layer w0.254: C6.2 63.95,94.625 64.6,95.275 U1.45 ; U1.48 66.1,95.375 66.825,94.65 C7.2
  Top Layer w1: v3(62.675,93.9) C6.2 ; C7.2 v3(68.15,93.9)
  Bottom Layer w1: 54.325,98.7 57.825,98.7 62.625,93.9 v3(68.15,93.9)
  other v1: 53.475,98.1 54.35,98.1 53.475,99.225 54.35,99.2
VDDS: C1.2 C2.2 C3.2 C4.2 C5.2 C20.2 J3.1 L1.2 R6.2 U1.13 U1.22 U1.34 U1.44 U3.1 | length 74.8
  Top Layer w0.254: C4.2 57.575,96.25 59.075,97.75 U1.34 ; U1.22 C1.2 ; C3.2 61.775,94.35 62.425,95 63.754,95 64.1,95.346 U1.44 ; U1.13 C2.2
  Top Layer w0.508: U3.1 44,104.825 44.45,104.375 C20.2@46.6,104.375 ; 52.05,104.35 52.1,104.4 ; R6.2@58.475,90.125 58.475,92.35
  Top Layer w0.8: 57.075,110.75 J3.1
  Top Layer w1: C20.2 52.05,104.35 ; L1.2@52.175,91.4 C5.2 ; 57.075,110.75 55.55,110.75 52.175,107.375 52.175,106.25 ; C4.2 57.55,93.275 57.625,93.2 ; R6.2 R6.2@58.475,90.125 ; C3.2 58.475,92.35 57.625,93.2 ; C2.2@66.075,105.15 C1.2 60.3,105.15 59.237,106.213 52.212,106.213 52.175,106.25 ; C5.2 57.625,93.2 ; C5.2 52.175,106.25
pads on no net: A1. D1.2 J3.6 J3.7 J3.8 U1.6 U1.7 U1.14 U1.15 U1.17 U1.19 U1.21 U1.28 U1.29 U1.30 U1.31 U1.32 U1.36 U1.37 U1.39 U1.40 U1.41 U1.42 U1.43 U3.8 U3.9 U3.10 U3.12 U3.13 U4.2
copper on no net:
  other v2: 95,79.3 100,79.3 95,81.3 100,81.3 95,83.3 100,83.3 95,85.3 100,85.3 95,87.3 100,87.3 94.969,89.299 100,89.3 95,91.3 100,91.3 95,93.3 100,93.3 95,95.3 100,95.3 100,97.3

## Polygon pours and split planes (outlines as drawn)
GND on Bottom Layer "Top Layer-No Net" (solid, remove dead copper, pour order 26): 26.25,117.875 26.25,75.25 101.75,75.25 101.75,117.75
GND on Top Layer "Top Layer-No Net" (solid, remove dead copper, pour order 28): 26.25,75.25 26.25,117.75 101.75,117.75 101.75,75.25

## Other copper
Top Layer:
  region: 54.7,130.5 55.6,130.5 56.175,131.075 56.075,131.175 54.7,131.175
  region net VDDR: 56.75,97.525 56.75,100.925 53.025,100.925 53.025,97.525
  region net 3V3: 46.775,86.275 46.8,86.3 51,86.3 51,91.85 49.8,91.85 49.35,91.35 49.35,87.6 46.775,87.6
  region net GND: 44.225,87.625 44.225,83.4 44.875,83.4 46.725,81.55 47.825,81.55 48.475,80.9 49.425,80.9 49.425,85.75 45.75,85.75 45.375,86 45.375,87.625
  region net NetL10_1: 44.1,88.525 44.6,89.025 44.6,93.225 42.8,93.225 42.8,89.325 43.1,89.025 43.6,88.525
  region net VBATT: 43.425,83.4 42.5,83.4 40.1,85.525 37.5,85.525 37.5,87.625 43.425,87.625
  region net NetC9_1: 68.325,96.5 68.325,95.85 68.675,95.5 71.65,95.5 71.65,96.5
  region net NetC11_1: 68.325,97 71.75,97 71.75,97.825 68.65,97.825 68.325,97.5
  region net NetC17_2: 69.5,98.225 69.5,98.725 70,99.225 71.75,99.225 71.75,98.225
  region net NetC11_2: 72.15,95.7 73.075,95.7 73.075,96.875 75.325,96.875 75.325,97.85 72.15,97.85
  region net NetC13_2: 75.825,97.025 78.425,97.025 78.425,97.725 75.825,97.725
  region net NetC10_1: 78.925,97.725 81.825,97.725 81.825,96.9 78.925,96.9
  region net NetC10_2: 82.225,96.9 82.225,97.725 84.7,97.725 84.7,96.9
  region net NetL3_1: 85.1,97.725 87,97.725 87,96.875 85.1,96.875
  region net NetA1_1: 87.45,98.475 87.45,96.875 88.75,96.875 88.75,97.725 88.05,97.725 88.05,98.475
  pour cut-out: 70.025,95.45 73.375,95.45 73.375,96.4 88.175,96.4 88.175,98.475 70.025,98.475
  pour cut-out: 88.25,117.875 101.875,117.875 101.875,75.125 88.25,75.125
Bottom Layer:
  region net VDDR: 53.025,99.675 53.025,97.65 55.5,97.65 56,98.2 56,99.2 55.5,99.675
  pour cut-out: 88.25,117.875 101.875,117.875 101.875,75.125 88.25,75.125

## Silkscreen, mask and mechanical layers (free items; w line width, h text height)
Top Overlay:
  circle w0.254: c73.8,81 r0.1
  lines w0.254: 72.027,82.895 cw(c73.8,80.6) 75.587,82.884 ; 72.524,82.268 cw(c73.8,80.6) 75.076,82.268 ; 73.033,81.654 cw(c73.8,80.6) 74.615,81.618
  text "Sub-1 GHz" at 68.4,78.5 h2.5
  text "rev. 1.0" at 69.8,76 h2.54
Mechanical 4:
  lines w0.127: 26,75 26,75 ; 26,75 102,75 102,118 26,118 26,75

## Dimensions
26,118 to 26,75 on Mechanical 1
26,75 to 102,75 on Mechanical 1